# Altium PCB lession3_HV.PcbDoc
Units mil, origin at the board's own origin, x right, y up, seen from the top; angles counter-clockwise.
Board outline 2450 x 2250 mil, 2 copper layers (Top Layer, Bottom Layer); 19 components, 17 nets, 83 pads, 0 vias.
Unrouted connection lines stored in the file: 40.
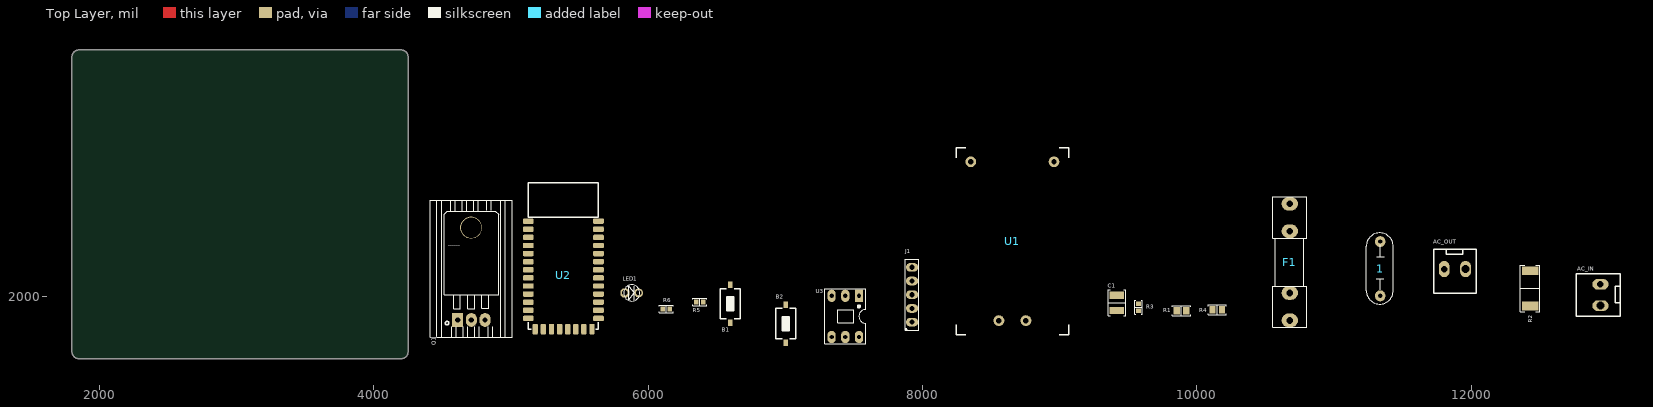
[diagram p0: Top Layer view]
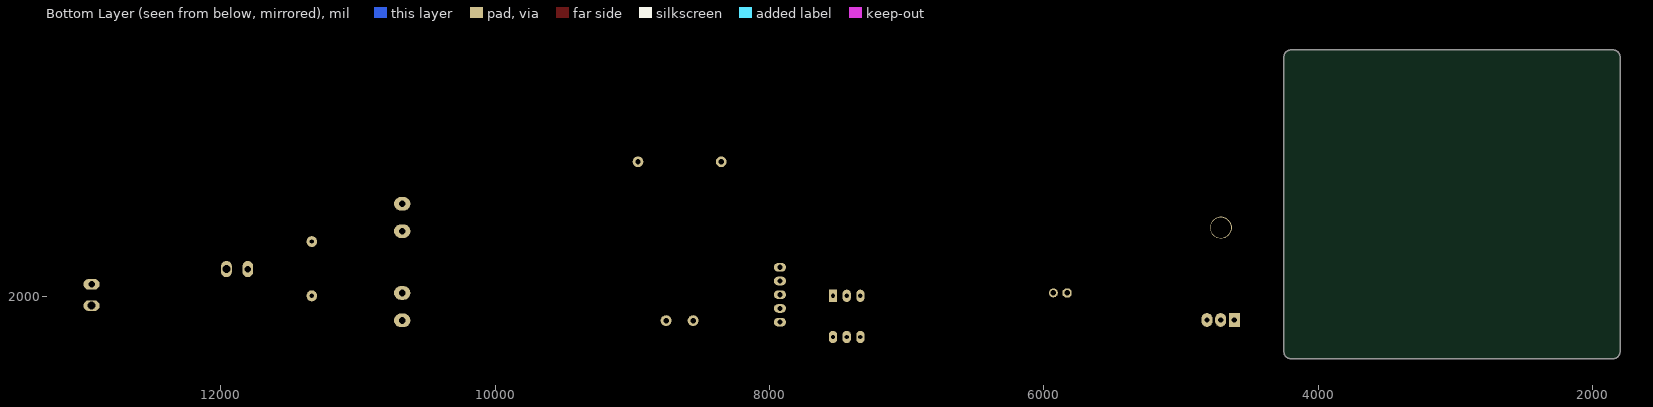
[diagram p1: Bottom Layer view, seen from below]

## Layer stack, top to bottom
Top Solder: solder mask 0.4, Solder Resist, Dk 3.5
Top Layer: signal copper 1.4
Dielectric 1: dielectric 12.6, FR-4, Dk 4.8
Bottom Layer: signal copper 1.4
Bottom Solder: solder mask 0.4, Solder Resist, Dk 3.5

## Board outline
1800,1600 1800,3750 cw(c1850,3750) 1850,3800 4200,3800 cw(c4200,3750) 4250,3750 4250,1600 cw(c4200,1600) 4200,1550 1850,1550 cw(c1850,1600)

## Design rules (kind name [scope] priority, off if disabled: settings)
Clearance [All] p1: gap=8 ignorepadtopadclearanceinfootprint=FALSE
PolygonConnect PolygonConnect_1 [IsVia] p1: connectstyle=Direct reliefconductorwidth=10 reliefentries=4 polygonreliefangle="90 Angle" airgapwidth=10
PolygonConnect [All] p2: connectstyle=Relief reliefconductorwidth=10 reliefentries=4 polygonreliefangle="90 Angle" airgapwidth=10
RoutingVias [All] p1: holewidth=28 width=50 viastyle="Through Hole" minholewidth=28 minwidth=50 maxholewidth=28 maxwidth=50
SolderMaskExpansion [All] p1: expansion=4
Width [All] p1: maxlimit=50 minlimit=10 preferedwidth=10
30 further rules are at their usual default settings.

## Components (designator, comment, footprint, x,y, rotation, side; value= is the part's Value field where it differs from the comment)
1 "XXpF" CN4 11336,2213 r270 top value=33pF
AC_IN "2 Pin" "Header 2P" 12941,1936.09 r180 top
AC_OUT "2 Pin" "Header 2P" 11958,2203 r270 top
B1 "USER" SW-SMD 6598,1950 r90 top
B2 "RESET" SW-SMD 7004,1805 r270 top
C1 "10u" "CAP 1210/3225 - 1.2MM" 9416,1957 r90 top value=0.1uF
F1 "8A - 6x30mm" FUSE2 10677,2254 r270 top value=Fuse
J1 "5 Pin" "SAMTEC SSW-105-03-T-S" 7924,2016 r90 top
LED1 "LED" LED-3MM-BLUE 5885,2029 r0 top value="LED 3 ly Single Colour"
Q1 "BTA136S" TO220NH 4611,1832 r0 top
R1 "220" "RES 0805/2012" 9887,1899 r0 top value=1K
R2 "100R/1W" "STACKPOLE CSRN2512" 12429,2062 r90 top
R3 "220" "RES 0603/1608" 9575,1924.41 r270 top value=1K
R4 "220" "RES 0805/2012" 10148,1906 r0 top value=1K
R5 "220" "RES 0603/1608" 6376.59,1964 r180 top value=1K
R6 "220" "RES 0603/1608" 6132.41,1913 r180 top value=1K
U1 "AC-DC 3.3V 0.2A" AC-DC 8655,2406 r90 top
U2 "HM10" HM10 5126,1767.11 r0 top
U3 "MOC3063" DIP6/W0.3 7537,2008 r180 top value=MOC3021

## Footprints (in the part's own frame and the unit in brackets; to place one, negate y for a bottom-side part, rotate by r counter-clockwise, add the part's x,y. Pads: shape width x height; smd on the part's side, far side on the other; paste and mask are expansions set on the pad)
AC-DC [mm]
  round 2 hole 1 mask+0.1: 1(-14.7,2.5) 2(-14.7,-2.5) 3(14.7,7.7) 4(14.7,-7.7)
  silkscreen extent -17.27,-10.41 17.27,10.41, body extent -17,-10.1 17,10.1, height 15.01
"CAP 1210/3225 - 1.2MM" [mm] "Chip Capacitor, 2-Leads, Body 3.20x2.50mm, IPC Medium Density"
  rect 1.3x2.7 smd: 1(-1.4,0) 2(1.4,0)
  silkscreen extent -2.37,-1.63 2.37,1.63, body extent -1.6,-1.25 1.6,1.25, height 1.2
CN4 [mil]
  oval 80x75 hole 31: 1(-190,0) 2(205,0)
  silkscreen extent -253,-102 265,95, body extent -251,-100 261,97, height 571
DIP6/W0.3 [mil] "6 PIN, W 300mil, Pin to pin 100mil"
  rect 60x90 hole 31.5: 1(0,0)
  oval 60x90 hole 31.5: 2(100,0) 3(200,0) 4(200,300) 5(100,300) 6(0,300)
  silkscreen extent -50,-50 250,350, body extent -58,-7 260,307, height 170
FUSE2 [mil] "De Fuse"
  oval 100x120 hole 50: 1(-425,0) 1(-225,0) 2(225,0) 2(425,0)
  silkscreen extent -475,-125 475,125, body extent -448,-117 459,127, height 378
"Header 2P" [mm]
  oval 3x2 hole 1.5 mask+0.1: 1(0,0)
  oval 3x2 hole 1.2 mask+0.1: 2(0,-3.96)
  silkscreen extent -3.63,-5.87 4.5,1.98, body extent -3.98,-5.89 4.52,1.97, height 10.9
HM10 [mm]
  rrect50% 2x1 smd: 1(0,19.939) 2(0,18.439) 3(0,16.939) 4(0,15.439) 5(0,13.939) 6(0,12.439) 7(0,10.939) 8(0,9.439) 9(0,7.939) 10(0,6.439) 11(0,4.939) 12(0,3.439) 13(0,1.939) 22(13,1.939) 23(13,3.439) 24(13,4.939) 25(13,6.439) 26(13,7.939) 27(13,9.439) 28(13,10.939) 29(13,12.439) 30(13,13.939) 31(13,15.439) 32(13,16.939) 33(13,18.439) 34(13,19.939)
  rrect50% 1x2 smd: 14(1.27,-0.061) 15(2.8,-0.061) 16(4.3,-0.061) 17(5.8,-0.061) 18(7.3,-0.061) 19(8.8,-0.061) 20(10.3,-0.061) 21(11.8,-0.061)
  Top Layer pour cut-out: 0,27.039 13,27.039 13,20.689 0,20.689
  Bottom Layer pour cut-out: 13,27.039 0,27.039 0,20.689 13,20.689
  silkscreen extent 0,-0.06 13,27.04, body extent 0,-0.06 13,27.01, height 1.65
LED-3MM-BLUE [mil]
  oct 65x65 hole 40: 1(-55,0)
  round 65 hole 40: 2(45,0)
  silkscreen extent -64,-59 54,59, body extent -72,-65 54,65, height 184
"RES 0603/1608" [mm] "Chip Resistor, 2-Leads, Body 1.60x0.80mm, IPC Medium Density"
  rect 0.85x0.95 smd: 1(-0.65,0) 2(0.65,0)
  silkscreen extent -1.27,-0.7 1.27,0.7, body extent -0.8,-0.4 0.8,0.4, height 0.45
"RES 0805/2012" [mm] "Chip Resistor, 2-Leads, Body 2.00x1.25mm, IPC Medium Density"
  rect 1.15x1.35 smd: 1(-0.875,0) 2(0.875,0)
  silkscreen extent -1.7,-0.9 1.7,0.9, body extent -0.95,-0.62 1.05,0.63, height 0.6
"SAMTEC SSW-105-03-T-S" [mm]
  oval 1.6x2.25 hole 0.95: 1(-5.08,0) 2(-2.54,0) 3(0,0) 4(2.54,0) 5(5.08,0)
  silkscreen extent -6.61,-1.27 6.61,1.27, body extent -6.6,-1.21 6.6,1.21, height 8.51
"STACKPOLE CSRN2512" [mm] "Chip Resistor, 2-Leads, Body 6.40x3.20mm, IPC Medium Density"
  rect 1.6x3.1 smd: 1(-3.25,0) 2(3.25,0)
  silkscreen extent -4.3,-1.8 4.3,1.8, body extent -3.25,-1.58 3.25,1.57, height 0.6
SW-SMD [mm] "Switch SMD type"
  rect 1.2x0.8 smd: 1(-3.5,0) 2(3.5,0)
  silkscreen extent -2.82,-1.85 2.82,1.85, body extent -3.05,-1.85 3.05,1.85, height 2.5
TO220NH [mil] "TO-220 - 1-2-3"
  rect 80x100 hole 39: 1(0,0)
  oval 80x100 hole 39: 2(100,0) 3(200,0)
  round 160 hole 150: H(98,673)
  silkscreen extent -200,-127 400,873, body extent -100,-4 300,764, height 165

## Part data
1: library part CN
B1 B2: library part BUTTON
C1: library part Capacitor, "SMT Capacitor"
F1: library part Fuse, "Fuse", Designed by=VanDungEvn
LED1: "LED Single colour Green and Red"
Q1: library part BTA12-600, "Silicon Bidirectional Triode Thyristor", Code_JEDEC=TO-251-AA, ComponentLink1Description="Manufacturer Link", ComponentLink1URL=http://www.motorola.com/, DatasheetDocument=1999, LatestRevisionDate=17-Jul-2002, LatestRevisionNote="Re-released for DXP Platform.", Note="Pin 2 is electrically connected to Pin 4 (TAB)", PackageReference=369-03, Published=29-Sep-2000, Publisher="Altium Limited"
R1 R3 R4 R5 R6: library part Resistor, "SMT Resistor"
R2: library part Res, "Res", Manufacturer="Generic Components", Class=Passive, Published=08/06/2000, Publisher="Altium Hobart Technology Centre", SubClass=R
U1: library part AC-DC
U3: library part MOC3021, "Single Opto"

## Nets (pads, with @x,y where several pads share a name; then routed paths per layer and width w, separated by ;. In a path a pad name is that pad's centre, name@x,y a point inside that pad or via, vN(x,y) a via of type N, cw(c..) or ccw(c..) an arc to the next point about the centre after c; other vN are vias at no path point)
AC+: AC_OUT.1 F1.1 U1.1
AC-: 1.2 AC_IN.1 Q1.1 R4.1 U1.2
BTN: B1.1 R6.2 U2.24
DB_CLK: J1.4 U2.7
DB_DATA: J1.3 U2.8
GND: B1.2 B2.2 C1.1 J1.5 U1.3 U2.13 U2.14 U2.21 U2.22
I/O: R3.1 U2.23
LED: LED1.2 U2.9
Net1_1: 1.1 R2.2
NetAC_IN_2: AC_IN.2 F1.2
NetAC_OUT_2: AC_OUT.2 Q1.2 R1.1 R2.1
NetLED1_1: LED1.1 R5.2
NetQ1_3: Q1.3 R4.2 U3.4
NetR1_2: R1.2 U3.6
NetR3_2: R3.2 U3.2
RST: B2.1 J1.2 U2.11
VCC: C1.2 J1.1 R5.1 R6.1 U1.4 U2.12 U3.1
pads on no net: Q1.H U2.1 U2.2 U2.3 U2.4 U2.5 U2.6 U2.10 U2.15 U2.16 U2.17 U2.18 U2.19 U2.20 U2.25 U2.26 U2.27 U2.28 U2.29 U2.30 U2.31 U2.32 U2.33 U2.34 U3.3 U3.5

## Text inside footprints (layer, text, board x,y; h text height)
Q1: Top Overlay "------" at 4542,2359 h30